# Altium PCB ECAD_Clock.PcbDoc (part 1 of 2)
Units mm, origin at the board's own origin, x right, y up, seen from the top; angles counter-clockwise.
Board outline 71.5 x 59 mm, 4 copper layers (Component Side, Ground, Power, Solder Side), stack 1.597 mm thick; 117 components, 85 nets, 458 pads, 750 vias.
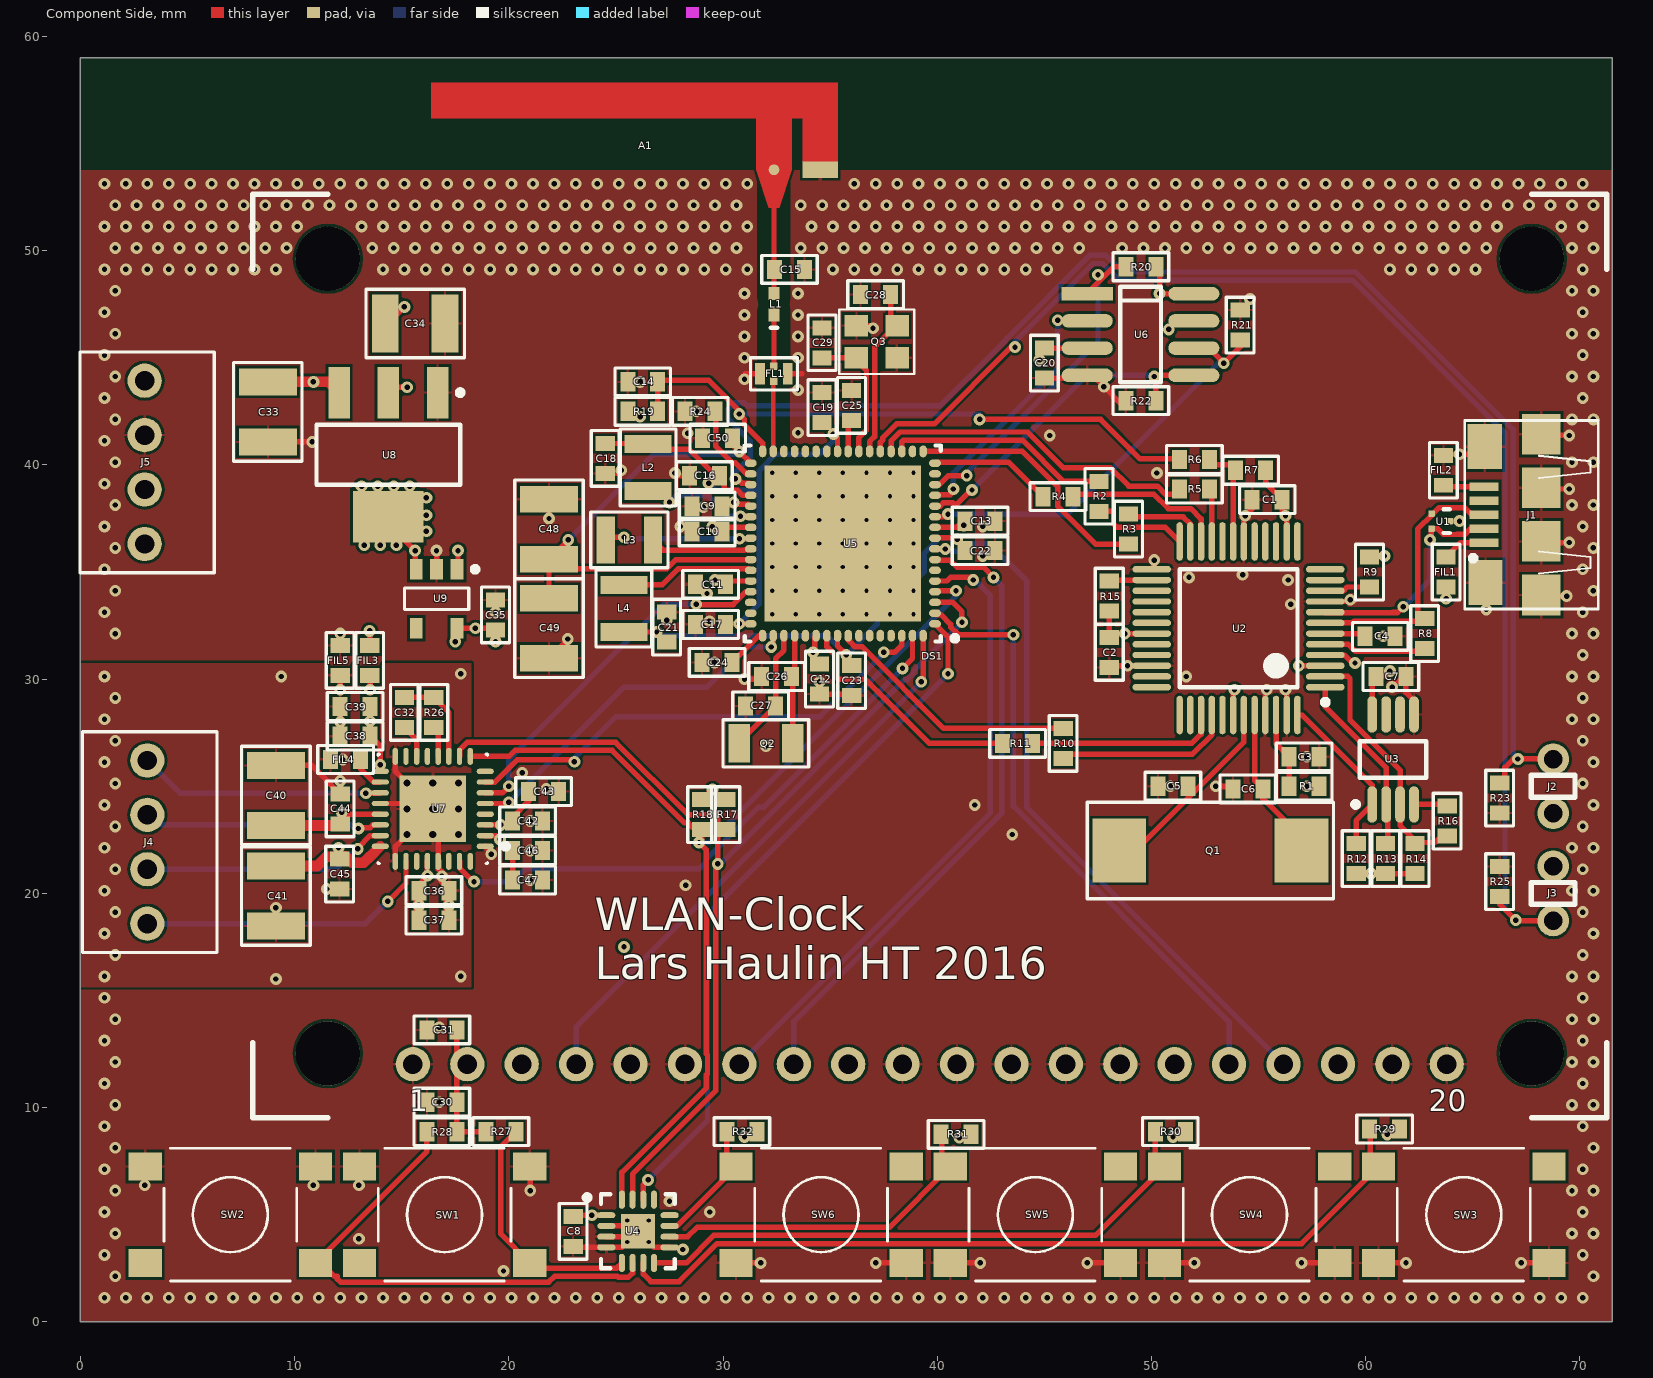
[diagram p0: Component Side view]
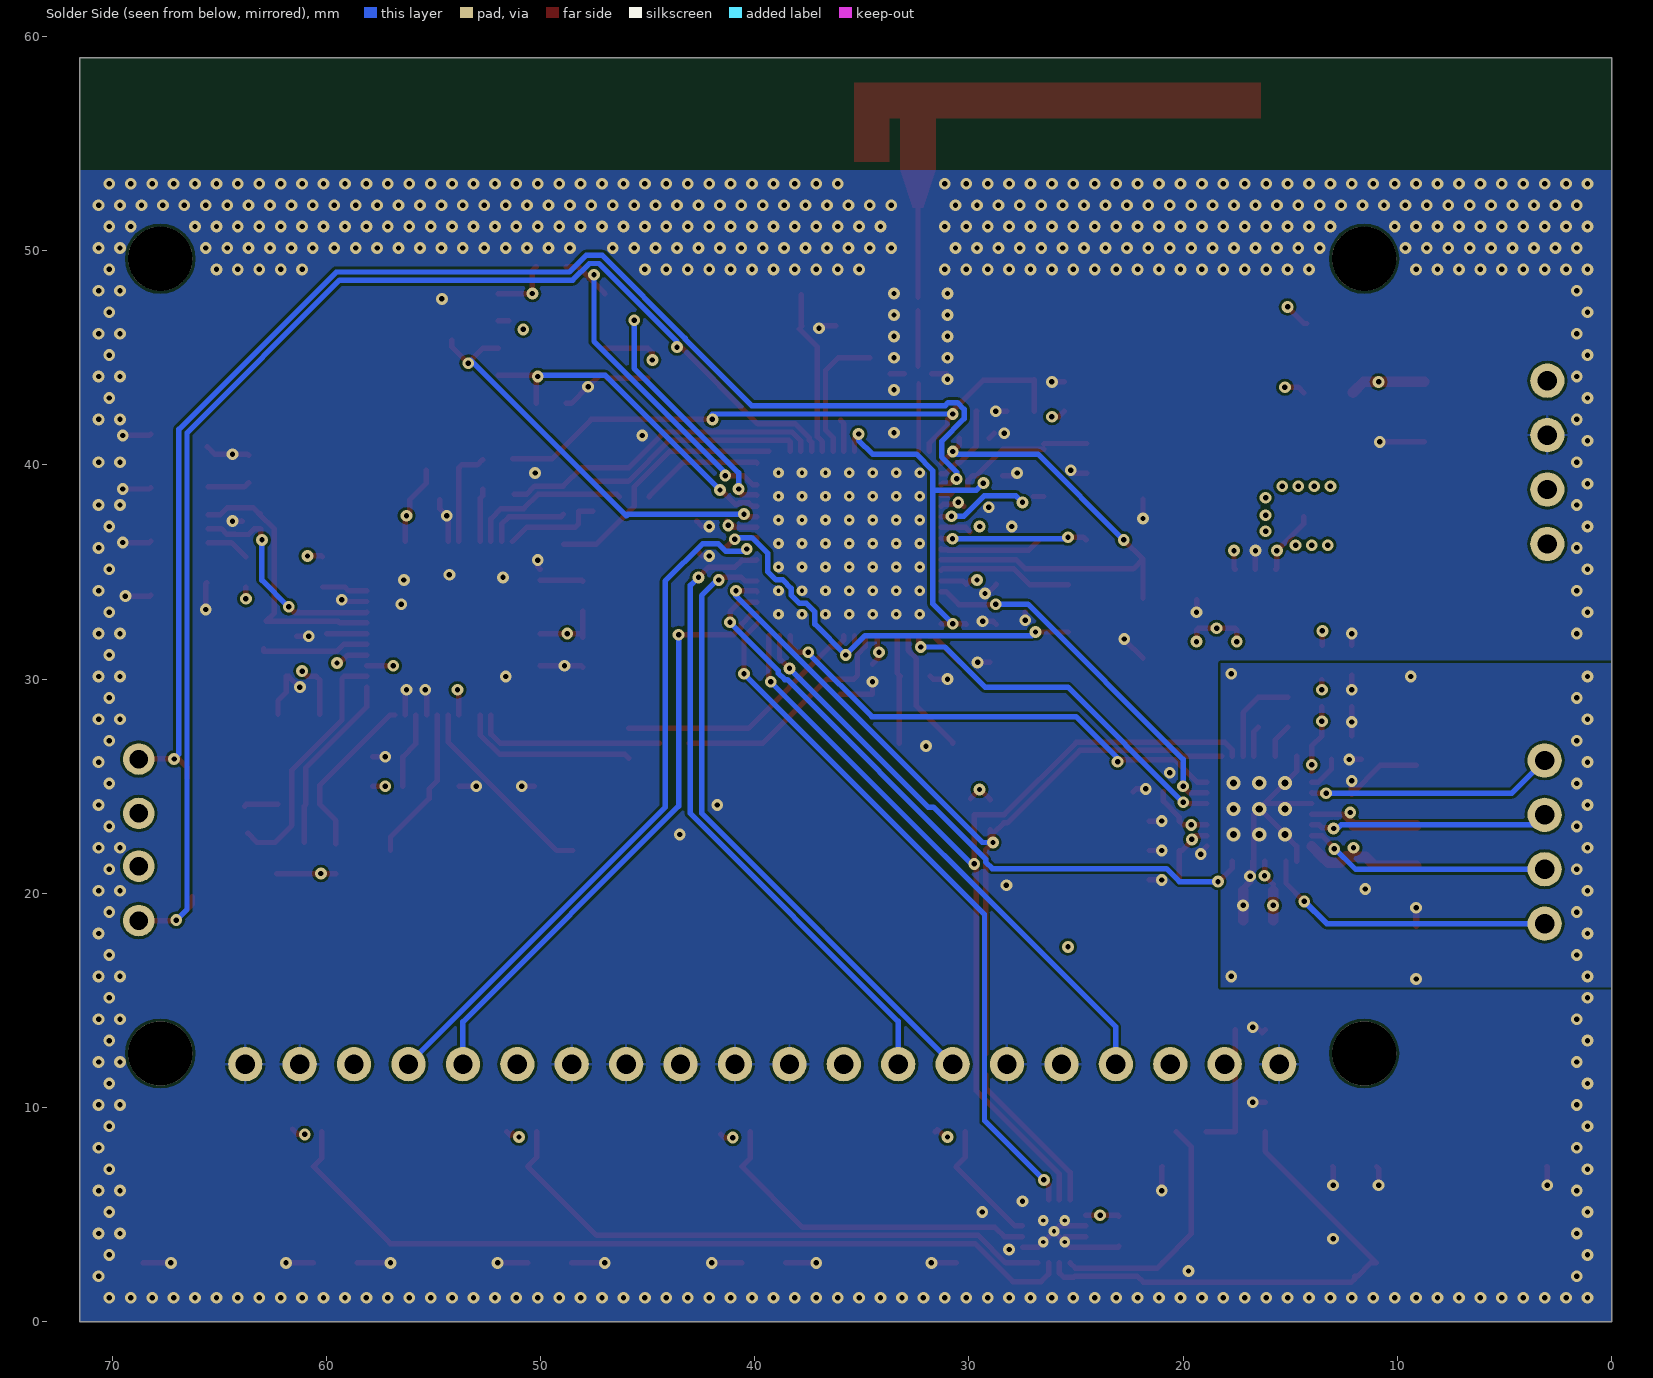
[diagram p1: Solder Side view, seen from below]
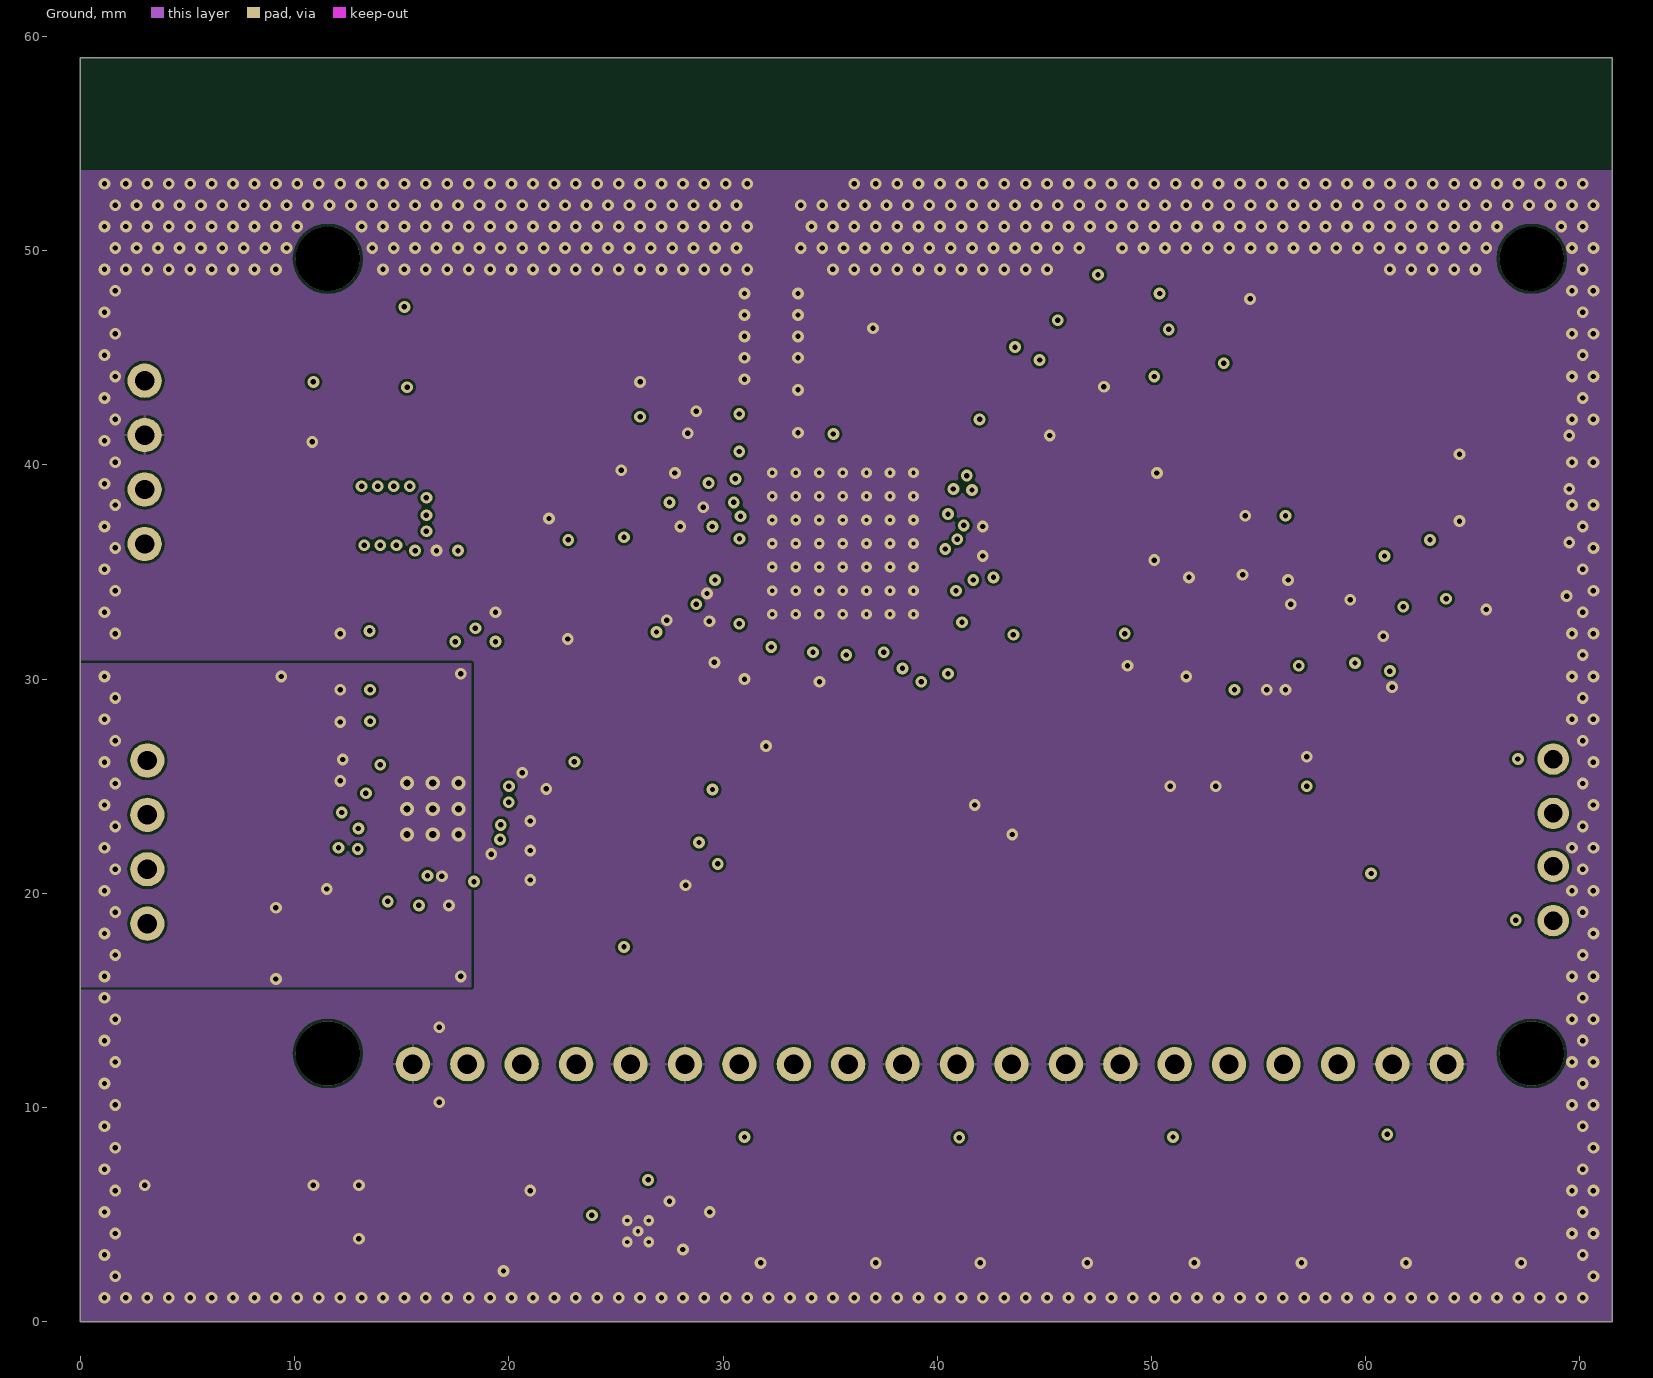
[diagram p2: Ground]
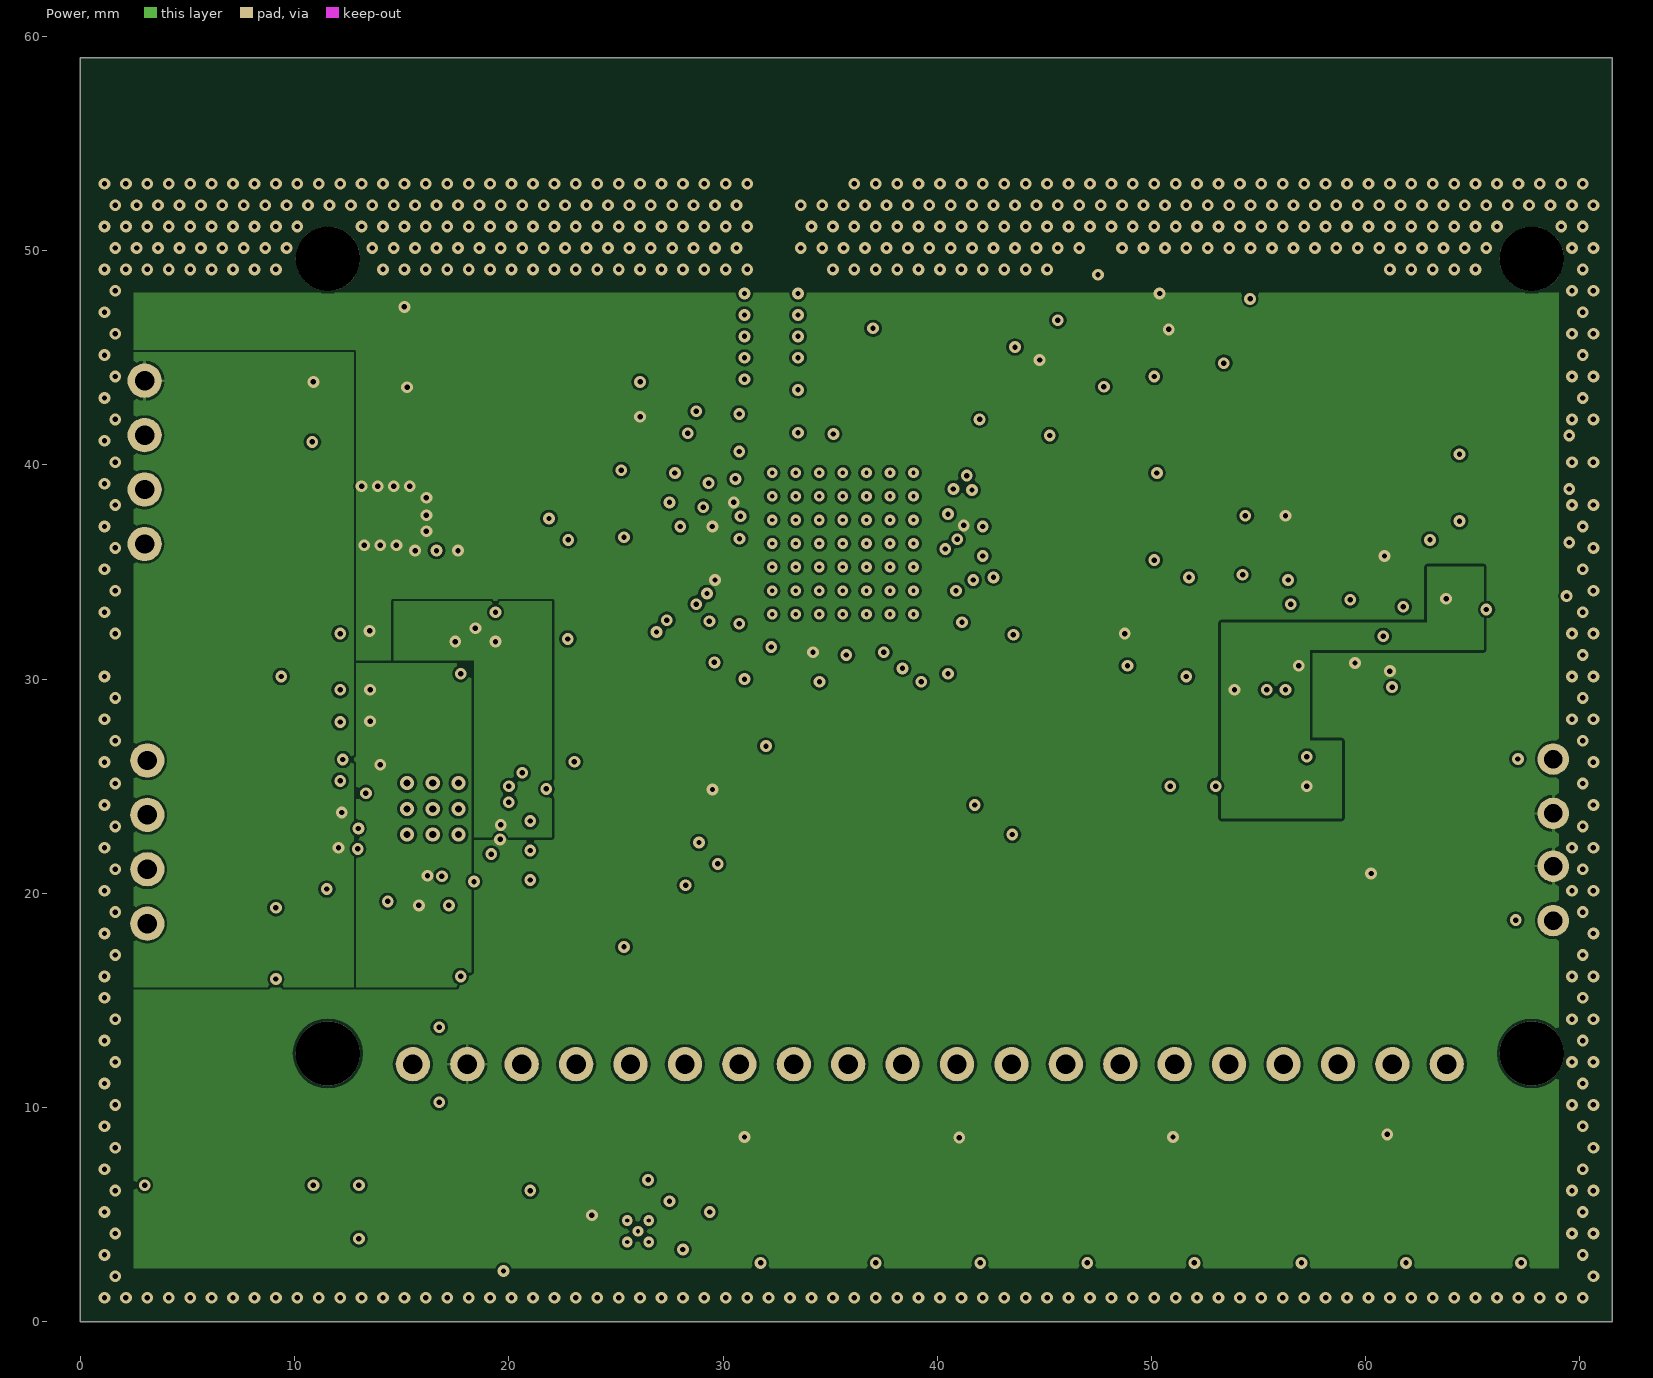
[diagram p3: Power]

## Layer stack, top to bottom
Top Solder: solder mask 0.0102, Solder Resist, Dk 3.5
Component Side: signal copper 0.0356
Dielectric 1: prepreg 0.127, FR-4, Dk 4.2
Ground: signal copper 0.036
Dielectric 3: core 1.2, FR-4, Dk 4.2
Power: signal copper 0.036
Dielectric 4: prepreg 0.127, FR-4, Dk 4.2
Solder Side: signal copper 0.0356
Bottom Solder: solder mask 0.0102, Solder Resist, Dk 3.5

## Board outline
0,0 0,59 71.5,59 71.5,0

## Design rules (kind name [scope] priority, off if disabled: settings)
Clearance AntennaClearance [InNetClass('AntennaTransmission') And IsWire vs InPolygon] p1: gap=0.675
Clearance [All] p2: gap=0.125
HoleSize [All] p1: absolutevalues=TRUE maxlimit=3.5 minlimit=0.025 maxpercent=80.000 minpercent=20.000
MinimumSolderMaskSliver [All] p1: minsoldermaskwidth=0
PolygonConnect ViaConnect [isVia] p1: connectstyle=Direct reliefconductorwidth=0.254 reliefentries=4 polygonreliefangle="90 Angle" airgapwidth=0.254
PolygonConnect [All] p2: connectstyle=Relief reliefconductorwidth=0.125 reliefentries=4 polygonreliefangle="90 Angle" airgapwidth=0.125
RoomDefinition Microcontroller [InComponentClass('Microcontroller')] p1: confinementstyle=ConfineIn formatcopy=TRUE lockcomponents=FALSE outline 15.986,51.618 15.986,57.972 36.317,57.972 36.317,50.229 55.814,50.229 55.814,47.939 56.02,41.591 43.555,41.591 43.555,19.875 65.271,19.875 65.271,27.34 70.75,27.34 70.75,17.031 40,17.031 40,25.571 29.671,25.571 29.671,29.746 19.946,29.746 19.946,51.618
RoomDefinition "Audio DAC" [InComponentClass('Audio DAC')] p2: confinementstyle=ConfineIn formatcopy=TRUE lockcomponents=FALSE outline -0.229,16.916 -0.229,27.874 11.146,27.874 11.146,32.504 13.104,32.504 14.479,32.504 14.479,30.074 17.479,30.074 17.479,27.349 20.352,27.349 20.352,25.729 23.254,25.729 23.254,23.771 22.504,23.771 22.504,22.396 22.504,19.646 19.879,19.646 19.879,16.271 16.621,16.271 16.621,16.916
RoomDefinition "External programmer" [InComponentClass('External programmer')] p3: confinementstyle=ConfineIn formatcopy=TRUE lockcomponents=FALSE outline 42.121,26.021 42.121,27.979 43.996,27.979 43.996,39.496 46.571,39.496 46.571,40.165 50.621,40.165 50.621,41.479 59.396,41.479 59.396,43.129 61.354,43.129 61.354,42.737 71.17,42.737 71.17,32.619 66.104,32.619 66.104,27.421 64.779,27.421 64.779,21.746 63.279,21.746 63.279,19.996 58.571,19.996 58.571,20.021 47.446,20.021 47.446,21.421 46.546,21.421 46.546,25.371 44.896,25.371 44.896,26.021
RoomDefinition Power [InComponentClass('Power')] p4: confinementstyle=ConfineIn formatcopy=TRUE lockcomponents=FALSE outline -0.354,34.641 -0.354,45.599 12.996,45.599 12.996,48.529 18.254,48.529 18.254,36.129 18.929,36.129 18.929,34.629 20.354,34.629 20.354,31.371 18.396,31.371 14.596,31.371 14.596,34.641
RoomDefinition "I/O extender" [InComponentClass('I/O extender')] p5: confinementstyle=ConfineIn formatcopy=TRUE lockcomponents=FALSE outline 1.683,1.532 1.683,8.468 11.682,8.468 28.021,8.468 28.021,25.379 29.271,25.379 29.271,26.004 31.229,26.004 31.229,8.468 49.892,8.468 69.892,8.468 69.892,1.532 59.892,1.532 49.257,1.532
RoomDefinition Display [InComponentClass('Display')] p6: confinementstyle=ConfineIn formatcopy=TRUE lockcomponents=FALSE outline 8.25,9.083 71.5,9.083 71.5,16 8.25,16
RoutingVias [All] p1: holewidth=0.711 width=1.27 viastyle="Through Hole" minholewidth=0.711 minwidth=1.27 maxholewidth=0.711 maxwidth=1.27
SolderMaskExpansion [All] p1: expansion=0.102
Width WidthAntenna [InNetClass('AntennaTransmission')] p1: maxlimit=0.225 minlimit=0.225 preferedwidth=0.225
Width WidthAudio [InNetClass('SpeakerLines')] p2: maxlimit=0.25 minlimit=0.25 preferedwidth=0.25
Width WidthPower [InNetClass('Power')] p3: maxlimit=0.5 minlimit=0.25 preferedwidth=0.5
Width [All] p4: maxlimit=0.254 minlimit=0.254 preferedwidth=0.254
28 further rules are at their usual default settings.

## Classes and differential pairs
net class SpeakerLines: SPLM SPLP SPRM SPRP
net class Power: +1.8VD +3.3VA +3.3VD +5.0VA +5.0VBUS AGND GND
component class Microcontroller: A1 C9 C10 C11 C12 C13 C14 C15 C16 C17 C18 C19 C20 C21 C22 C23 C24 C25 C26 C27 C28 C29 C48 C49 C50 FL1 J2 J3 L1 L2 L3 L4 Q2 Q3 R19 R20 R21 R22 R23 R24 R25 U5 U6
component class "I/O extender": C8 R17 R18 R27 R28 R29 R30 R31 R32 SW1 SW2 SW3 SW4 SW5 SW6 U4
component class "External programmer": C1 C2 C3 C4 C5 C6 C7 FIL1 FIL2 J1 Q1 R1 R2 R3 R4 R5 R6 R7 R8 R9 R10 R11 R12 R13 R14 R15 R16 U1 U2 U3
component class Display: C30 C31 DS1
component class "Audio DAC": C32 C36 C37 C38 C39 C40 C41 C42 C43 C44 C45 C46 C47 FIL3 FIL4 FIL5 J4 R26 U7
component class Power: C33 C34 C35 J5 U8 U9
net class AntennaTransmission: ANT_CONN ANT_FILT ANT_UC

## Components (designator, comment, footprint, x,y, rotation, side; value= is the part's Value field where it differs from the comment)
A1 "Antenna_2.4GHz_L" Antenna_2.45GHz_IFA1_L 32.375,53.775 r0 top net-tie
C1 "100nF" C_0603A 55.4,38.375 r180 top
C2 "100nF" C_0603A 48.025,31.25 r270 top
C3 "100nF" C_0603A 57.125,26.375 r0 top
C4 "33nF" C_0603A 60.675,32 r0 top
C5 "27pF" C_0603A 51,25 r180 top
C6 "27pF" C_0603A 54.5,24.875 r180 top
C7 "100nF" C_0603A 61.175,30.125 r0 top
C8 "100nF" C_0603A 23,4.225 r270 top
C9 "4.7uF" C_0603A 29.25,38.075 r180 top
C10 "4.7uF" C_0603A 29.25,36.875 r180 top
C11 "4.7uF" C_0603A 29.417,34.425 r180 top
C12 "0.1uF" C_0603A 34.5,30 r270 top
C13 "0.1uF" C_0603A 42,37.375 r0 top
C14 "100nF" C_0603A 26.25,43.875 r180 top
C15 "100nF" C_0603A 33.1,49.125 r0 top
C16 "100nF" C_0603A 29.125,39.5 r180 top
C17 "100nF" C_0603A 29.417,32.55 r180 top
C18 "10uF" C_0603A 24.5,40.3 r270 top
C19 "100nF" C_0603A 34.617,42.675 r90 top
C20 "100nF" C_0603A 45,44.75 r270 top
C21 "10uF" C_0603A 27.367,32.425 r90 top
C22 "100nF" C_0603A 42,36 r0 top
C23 "100nF" C_0603A 36,29.925 r270 top
C24 "100nF" C_0603A 29.717,30.78 r180 top
C25 "100nF" C_0603A 35.992,42.78 r90 top
C26 "10pF" C_0603A 32.5,30.125 r180 top
C27 "10pF" C_0603A 31.75,28.75 r180 top
C28 "6.2pF" C_0603A 37.117,47.95 r180 top
C29 "6.2pF" C_0603A 34.617,45.7 r90 top
C30 "100nF" C_0603A 16.875,10.25 r180 top
C31 "4.5uF" C_0603A 16.875,13.625 r180 top
C32 "100nF" C_0603A 15.125,28.445 r270 top
C33 "100uF" C_1210D 8.75,42.475 r270 top
C34 "100uF" C_1210D 15.625,46.6 r0 top
C35 "10uF" C_0603A 19.375,33 r90 top
C36 "100nF" C_0603A 16.5,20.125 r0 top
C37 "10uF" C_0603A 16.5,18.75 r0 top
C38 "100nF" C_0603A 12.823,27.345 r180 top
C39 "10uF" C_0603A 12.823,28.72 r180 top
C40 "22uF" C_1210D 9.125,24.57 r90 top
C41 "22uF" C_1210D 9.125,19.88 r270 top
C42 "100nF" C_0603A 20.875,23.375 r0 top
C43 "10uF" C_0603A 21.625,24.75 r0 top
C44 "100nF" C_0603A 12.125,23.945 r90 top
C45 "100nF" C_0603A 12.1,20.9 r270 top
C46 "100nF" C_0603A 20.875,22 r0 top
C47 "10uF" C_0603A 20.875,20.625 r0 top
C48 "22uF" C_1210D 21.875,37 r90 top
C49 "22uF" C_1210D 21.875,32.375 r270 top
C50 "100nF" C_0603A 29.75,41.25 r180 top
DS1 "NHD-2.23-12832UCY3" NHD-2.23-12832UCY3_FP 39.65,12.025 r0 top locked
FIL1 "FB" FB_0603 63.75,35 r90 top
FIL2 "FB" FB_0603 63.625,39.75 r270 top
FIL3 "FB" FB_0603 13.5,30.875 r270 top
FIL4 "FB" FB_0603 12.375,26.25 r0 top
FIL5 "FB" FB_0603 12.125,30.875 r270 top
FL1 "DEA202450BT-1294C1-H" DEA202450BT-1294C1-H 32.375,44.25 r0 top
J1 "USB Micro Type-B_SMD" "MICRO USB TYPE-B_SMD" 64.819,37.675 r90 top
J2 "SOP0" JUMPER100 68.75,25 r90 top
J3 "SOP2" JUMPER100 68.75,20 r270 top
J4 "282834-4" HEADER_2.54_SCREW_4PIN 3.125,22.395 r270 top
J5 "282834-4" HEADER_2.54_SCREW_4PIN 3,40.12 r270 top
L1 "3.6nH" 0402-A 32.375,47.5 r90 top
L2 "2.2uH" L_1008 26.5,39.875 r270 top
L3 "1uH" L_1008 25.625,36.5 r180 top
L4 "2.2uH" L_1008 25.367,33.3 r90 top
Q1 "6MHz" QUARTZ_10x4.5 52.75,22 r0 top
Q2 "32.768" Q_FC135 32,27 r180 top
Q3 "40MHz" SM/25X20/CMOS_CLK_4 37.175,45.75 r180 top
R1 "100k" R_0603 57.125,25 r180 top
R2 "27" R_0603 47.55,38.536 r270 top
R3 "27" R_0603 48.925,37 r90 top
R4 "27" R_0603 45.625,38.517 r0 top
R5 "27" R_0603 52,38.875 r0 top
R6 "27" R_0603 52,40.25 r0 top
R7 "10k" R_0603 54.625,39.75 r180 top
R8 "1,5k" R_0603 62.75,32.125 r90 top
R9 "10k" R_0603 60.175,35 r270 top
R10 "27" R_0603 45.875,27 r270 top
R11 "27" R_0603 43.75,27 r0 top
R12 "10k" R_0603 59.55,21.625 r90 top
R13 "10k" R_0603 60.925,21.625 r90 top
R14 "10k" R_0603 62.3,21.625 r90 top
R15 "10k" R_0603 48.025,33.875 r90 top
R16 "2.2k" R_0603 63.8,23.375 r90 top
R17 "10k" R_0603 30.125,23.675 r270 top
R18 "10k" R_0603 29,23.673 r270 top
R19 "100k" R_0603 26.25,42.5 r0 top
R20 "100k" R_0603 49.5,49.25 r180 top
R21 "100k" R_0603 54.138,46.525 r270 top
R22 "100k" R_0603 49.5,43 r0 top
R23 "100k" R_0603 66.25,24.45 r270 top
R24 "100k" R_0603 28.925,42.5 r180 top
R25 "2.7k" R_0603 66.25,20.55 r90 top
R26 "2.2k" R_0603 16.5,28.445 r270 top
R27 "100k" R_0603 19.625,8.875 r0 top
R28 "100k" R_0603 16.875,8.875 r180 top
R29 "100k" R_0603 60.875,9 r180 top
R30 "100k" R_0603 50.875,8.875 r180 top
R31 "100k" R_0603 40.875,8.75 r180 top
R32 "100k" R_0603 30.875,8.875 r180 top
SW1 "430152130826" 430152130826 17,5 r180 top
SW2 "430152130826" 430152130826 7,5 r180 top
SW3 "430152130826" 430152130826 64.575,5 r0 top
SW4 "430152130826" 430152130826 54.575,5 r0 top
SW5 "430152130826" 430152130826 44.575,5 r0 top
SW6 "430152130826" 430152130826 34.575,5 r0 top
U1 "TPD2EUSB30ADRTR" DRT0003A 63.5,37.375 r0 top
U2 "FT2232D" LQFP-48_N 54.061,32.375 r180 top
U3 "93LC46B-I/MS" MSOP-MS8_N 61.275,26.25 r90 top
U4 "PCF8574RGTRG4" RGT16-1600X1600TP 26.025,4.225 r0 top
U5 "CC3200" PQFN50P900X900X100_HS-65N 35.592,36.33 r180 top
U6 "M25PX80-VMN6TP" SOG.050/8/WG.244/L.175 46.997,47.992 r270 top
U7 "TLV320AIC3110" QFN50P500X500X80-32N 16.448,23.945 r180 top
U8 "LD1117S33CTR" SOT-223_N 14.375,40.475 r270 top
U9 "RT9080-18GJ5" SOT95P275X100-5N 16.625,33.75 r270 top

## Footprints (in the part's own frame and the unit in brackets; to place one, negate y for a bottom-side part, rotate by r counter-clockwise, add the part's x,y. Pads: shape width x height; smd on the part's side, far side on the other; paste and mask are expansions set on the pad)
0402-A [mm] "Chip Inductor, Body 1.0x0.5mm, IPC High Density"
  rect 0.6x0.5 smd: 1(-0.5,0) 2(0.5,0)
  silkscreen extent -1.1,-0.15 -1.1,0.15, body extent -0.55,-0.3 0.55,0.3, height 0.55
430152130826 [mm] "6*6mm vertical type, SMD, height 13.0mm, white actuator, 260gf, T&R"
  rect 1.55x1.3 smd: 1(-3.975,2.25) 2(-3.975,-2.25) 3(3.975,2.25) 4(3.975,-2.25)
  silkscreen extent -3.1,-3.1 3.1,3.1, body extent -4.5,-3.1 4.5,3.1, height 12.99
Antenna_2.45GHz_IFA1_L [mil]
  round 19.68 smd: 1(0,0)
  rect 65x30 smd: 2(85,0)
  Component Side region: 117.5,15 52.5,15 52.5,160 117.5,160
  Component Side region: 117.5,160.16 117.5,95 -630,95 -630,160.16
  Component Side region: 32.66,0.16 10,-70 -10,-70 -32.5,0.16 -32.5,160 32.66,160
C_0603A [mm]
  rect 0.7x0.9 smd: 1(-0.7,0) 2(0.7,0)
  silkscreen extent -1.3,-0.65 1.3,0.65, body extent -0.8,-0.4 0.8,0.4, height 0.52
C_1210D [mm]
  rect 1.25x2.7 smd: 1(-1.4,0) 2(1.4,0)
  silkscreen extent -2.3,-1.6 2.3,1.6, body extent -1.6,-1.25 1.6,1.25, height 2.52
DEA202450BT-1294C1-H [mm]
  rect 0.35x0.35 smd: 1(0,-0.35) 3(0,0.35)
  rect 0.45x1 smd: 2(0.65,0) 4(-0.65,0)
  silkscreen extent -1.1,-0.75 1.1,0.75, body extent -1,-0.65 1,0.65, height 0.81
DRT0003A [mm] "SOTFL, 3-Leads, Body 1x1mm (inc leads), Pitch 0.35mm"
  rrect33% 0.3x0.3 smd: 1(-0.425,0.35) 2(-0.425,-0.35) 3(0.425,0)
  silkscreen extent 0.12,-0.55 0.43,0.55, body extent -0.5,-0.5 0.5,0.5, height 0.5
FB_0603 [mm]
  rect 0.7x0.9 smd: 1(-0.7,0) 2(0.7,0)
  silkscreen extent -1.3,-0.65 1.3,0.65, body extent -0.8,-0.4 0.8,0.4, height 0.42
HEADER_2.54_SCREW_4PIN [mm]
  round 1.6 hole 0.9: 1(-3.81,0) 2(-1.27,0) 3(1.27,0) 4(3.81,0)
  silkscreen extent -5.15,-3.02 5.15,3.25, body extent -5.15,-3.03 5.15,3.19, height 8.64
JUMPER100 [mil]
  round 58 hole 34: 1(-50,0) 2(50,0)
  silkscreen extent -20,-40 20,40
L_1008 [mm]
  rect 0.85x2.2 smd: 1(-1.1,0) 2(1.1,0)
  silkscreen extent -1.8,-1.3 1.8,1.3, body extent -1.25,-1 1.25,1, height 1.62
LQFP-48_N [mm] "Thin QFP, 48-Leads, Body 7x7mm, Pitch 0.5mm, IPC Medium Density"
  oval 1.8x0.3 smd: 1(-4.05,2.75) 2(-4.05,2.25) 3(-4.05,1.75) 4(-4.05,1.25) 5(-4.05,0.75) 6(-4.05,0.25) 7(-4.05,-0.25) 8(-4.05,-0.75) 9(-4.05,-1.25) 10(-4.05,-1.75) 11(-4.05,-2.25) 12(-4.05,-2.75) 25(4.05,-2.75) 26(4.05,-2.25) 27(4.05,-1.75) 28(4.05,-1.25) 29(4.05,-0.75) 30(4.05,-0.25) 31(4.05,0.25) 32(4.05,0.75) 33(4.05,1.25) 34(4.05,1.75) 35(4.05,2.25) 36(4.05,2.75)
  oval 0.3x1.8 smd: 13(-2.75,-4.05) 14(-2.25,-4.05) 15(-1.75,-4.05) 16(-1.25,-4.05) 17(-0.75,-4.05) 18(-0.25,-4.05) 19(0.25,-4.05) 20(0.75,-4.05) 21(1.25,-4.05) 22(1.75,-4.05) 23(2.25,-4.05) 24(2.75,-4.05) 37(2.75,4.05) 38(2.25,4.05) 39(1.75,4.05) 40(1.25,4.05) 41(0.75,4.05) 42(0.25,4.05) 43(-0.25,4.05) 44(-0.75,4.05) 45(-1.25,4.05) 46(-1.75,4.05) 47(-2.25,4.05) 48(-2.75,4.05)
  silkscreen extent -4.18,-2.75 2.75,3.57, body extent -3.5,-3.5 3.5,3.5, height 1.6
"MICRO USB TYPE-B_SMD" [mm]
  rect 0.4x1.35 smd: 1(-1.3,-0.7) 2(-0.65,-0.7) 3(0,-0.7) 4(0.65,-0.7) 5(1.3,-0.7)
  rect 1.9x1.8 smd: SH(-3.75,-3.375) SH(-1.244,-3.375) SH(1.256,-3.375) SH(3.756,-3.375)
  rect 2.1x1.6 smd: SH(-3.175,-0.765) SH(3.175,-0.735)
  silkscreen extent -4.4,-6.03 4.4,0.2, body extent -3.9,-6.03 3.9,-1.03, height 2.68
MSOP-MS8_N [mm] "TSOP, 8-Leads, Body 3x3mm, Pitch 0.65mm, IPC Medium Density"
  oval 1.7x0.45 smd: 1(-2.1,0.975) 2(-2.1,0.325) 3(-2.1,-0.325) 4(-2.1,-0.975) 5(2.1,-0.975) 6(2.1,-0.325) 7(2.1,0.325) 8(2.1,0.975)
  silkscreen extent -2.22,-1.55 0.85,1.87, body extent -1.55,-1.55 1.55,1.55, height 1.1
NHD-2.23-12832UCY3_FP [mm]
  round 1.6 hole 0.9: 1(-24.13,0) 2(-21.59,0) 3(-19.05,0) 4(-16.51,0) 5(-13.97,0) 6(-11.43,0) 7(-8.89,0) 8(-6.35,0) 9(-3.81,0) 10(-1.27,0) 11(1.27,0) 12(3.81,0) 13(6.35,0) 14(8.89,0) 15(11.43,0) 16(13.97,0) 17(16.51,0) 18(19.05,0) 19(21.59,0) 20(24.13,0)
  round 3 hole 3 unplated: 21(-28.1,0.5) 21(-28.1,37.6) 21(28.1,0.5) 21(28.1,37.6)
  silkscreen extent -31.6,-2.5 31.6,40.6, body extent -31.6,-2.5 31.6,40.6, height 8.5
PQFN50P900X900X100_HS-65N [mm] "PQFN, 64-Leads, Body 9.00x9.00mm, Pitch 0.50mm, Thermal Pad 7.30x7.30mm, IPC Medium Density"
  oval 0.55x0.35 smd: 1(-4.3,3.75) 2(-4.3,3.25) 3(-4.3,2.75) 4(-4.3,2.25) 5(-4.3,1.75) 6(-4.3,1.25) 7(-4.3,0.75) 8(-4.3,0.25) 9(-4.3,-0.25) 10(-4.3,-0.75) 11(-4.3,-1.25) 12(-4.3,-1.75) 13(-4.3,-2.25) 14(-4.3,-2.75) 15(-4.3,-3.25) 16(-4.3,-3.75) 33(4.3,-3.75) 34(4.3,-3.25) 35(4.3,-2.75) 36(4.3,-2.25) 37(4.3,-1.75) 38(4.3,-1.25) 39(4.3,-0.75) 40(4.3,-0.25) 41(4.3,0.25) 42(4.3,0.75) 43(4.3,1.25) 44(4.3,1.75) 45(4.3,2.25) 46(4.3,2.75) 47(4.3,3.25) 48(4.3,3.75)
  oval 0.35x0.55 smd: 17(-3.75,-4.3) 18(-3.25,-4.3) 19(-2.75,-4.3) 20(-2.25,-4.3) 21(-1.75,-4.3) 22(-1.25,-4.3) 23(-0.75,-4.3) 24(-0.25,-4.3) 25(0.25,-4.3) 26(0.75,-4.3) 27(1.25,-4.3) 28(1.75,-4.3) 29(2.25,-4.3) 30(2.75,-4.3) 31(3.25,-4.3) 32(3.75,-4.3) 49(3.75,4.3) 50(3.25,4.3) 51(2.75,4.3) 52(2.25,4.3) 53(1.75,4.3) 54(1.25,4.3) 55(0.75,4.3) 56(0.25,4.3) 57(-0.25,4.3) 58(-0.75,4.3) 59(-1.25,4.3) 60(-1.75,4.3) 61(-2.25,4.3) 62(-2.75,4.3) 63(-3.25,4.3) 64(-3.75,4.3)
  rect 7.3x7.3 smd: 65(0,0)
  silkscreen extent -5.35,-4.57 4.57,4.58, body extent -4.57,-4.57 4.57,4.57, height 1
Q_FC135 [mm]
  rect 1x1.8 smd: 1(-1.25,0) 2(1.25,0)
  silkscreen extent -2,-1.1 2,1.1, body extent -1.6,-0.8 1.6,0.8, height 0.8
QFN50P500X500X80-32N [mm]
  oval 0.8x0.25 smd: 1(-2.45,1.75) 2(-2.45,1.25) 3(-2.45,0.75) 4(-2.45,0.25) 5(-2.45,-0.25) 6(-2.45,-0.75) 7(-2.45,-1.25) 8(-2.45,-1.75) 17(2.45,-1.75) 18(2.45,-1.25) 19(2.45,-0.75) 20(2.45,-0.25) 21(2.45,0.25) 22(2.45,0.75) 23(2.45,1.25) 24(2.45,1.75)
  oval 0.25x0.8 smd: 9(-1.75,-2.45) 10(-1.25,-2.45) 11(-0.75,-2.45) 12(-0.25,-2.45) 13(0.25,-2.45) 14(0.75,-2.45) 15(1.25,-2.45) 16(1.75,-2.45) 25(1.75,2.45) 26(1.25,2.45) 27(0.75,2.45) 28(0.25,2.45) 29(-0.25,2.45) 30(-0.75,2.45) 31(-1.25,2.45) 32(-1.75,2.45)
  rect 3.1x3.1 smd: 33(0,0)
  silkscreen extent -3.53,-2.55 2.55,2.55, body extent -2.55,-2.55 2.55,2.55, height 0.8
QUARTZ_10x4.5 [mm]
  rect 2.5x3 smd: 1(-4.25,0) 2(4.25,0)
  silkscreen extent -5.75,-2.25 5.75,2.25, body extent -5,-2.25 5,2.22, height 1.7
R_0603 [mm]
  rect 0.7x0.9 smd: 1(-0.7,0) 2(0.7,0)
  silkscreen extent -1.3,-0.65 1.3,0.65, body extent -0.8,-0.4 0.8,0.4, height 0.42
RGT16-1600X1600TP [mm] "QFN, 16-Leads, Body 3x3mm, Pitch 0.5mm, Thermal Pad 1.6x1.6mm, TI Recommended"
  oval 0.85x0.28 smd paste-0.025 mask+0.07: 1(-1.475,0.75) 2(-1.475,0.25) 3(-1.475,-0.25) 4(-1.475,-0.75) 9(1.475,-0.75) 10(1.475,-0.25) 11(1.475,0.25) 12(1.475,0.75)
  oval 0.28x0.85 smd paste-0.025 mask+0.07: 5(-0.75,-1.475) 6(-0.25,-1.475) 7(0.25,-1.475) 8(0.75,-1.475) 13(0.75,1.475) 14(0.25,1.475) 15(-0.25,1.475) 16(-0.75,1.475)
  rect 1.6x1.6 smd paste-0.8 mask+0.07: 17(0,0)
  silkscreen extent -2.5,-1.73 1.72,1.73, body extent -1.57,-1.57 1.58,1.58, height 1
SM/25X20/CMOS_CLK_4 [mm]
  rect 1.1x1 smd: 1(-0.95,-0.75) 2(0.95,-0.75) 3(0.95,0.75) 4(-0.95,0.75)
  silkscreen extent -1.75,-1.5 1.75,1.5, body extent -1.25,-1 1.25,1, height 0.75
SOG.050/8/WG.244/L.175 [mil]
  rect 25x94 smd: 1(0,0)
  oval 25x94 smd: 2(50,0) 3(100,0) 4(150,0) 5(150,196) 6(100,196) 7(50,196) 8(0,196)
  silkscreen extent -12,60 163,135, body extent -22,21 171,176, height 59
SOT95P275X100-5N [mm]
  rect 0.95x0.6 smd: 1(-1.375,0.95) 2(-1.375,0) 3(-1.375,-0.95) 4(1.375,-0.95) 5(1.375,0.95)
  silkscreen extent -1.5,-1.5 0.5,1.93, body extent -1.5,-1.5 1.5,1.5, height 1
SOT-223_N [mm] "SOT223, 4-Leads, Body 6.5x3.5mm, Pitch 2.3mm, Lead Span 7mm, IPC Medium Density"
  rect 2.4x1 smd: 1(-2.9,2.3) 2(-2.9,0) 3(-2.9,-2.3)
  rect 2.4x3.3 smd: 4(2.9,0)
  silkscreen extent -3.02,-3.35 1.4,3.48, body extent -1.85,-3.35 1.85,3.35, height 1.8

## Part data
C1 C2 C3 C4 C5 C6 C7 C8 C9 C10 C11 C12 C13 C14 C15 C16 C17 C18 C19 C20 C21 C22 C23 C24 C25 C26 C27 C28 C29 C30 C31 C32 C35 C36 C37 C38 C39 C42 C43 C44 C45 C46 C47 C50: library part C_0603
C33 C34 C40 C41 C48 C49: library part C_1210
DS1: "OLED DISPLAY"
FIL1 FIL2 FIL3 FIL4 FIL5: library part FB_0603
FL1: "2.45 GHz filter"
J1: "USB Micro Type-B"
J2 J3: library part JUMPER_100, "Jumper 2.54 mm"
J4 J5: library part TERM_LIST_4
L1: library part Inductor, "Inductor"
L2 L3 L4: library part L_1008
Q1: library part QUARTZ_10x4.5mm
Q2: library part QUARTZ_3.2x1.5
Q3: library part QUARTZ_3.2x2.5
R1 R2 R3 R4 R5 R6 R7 R8 R9 R10 R11 R12 R13 R14 R15 R16 R17 R18 R19 R20 R21 R22 R23 R24 R25 R26 R27 R28 R29 R30 R31 R32: library part R_0603
SW1 SW2 SW3 SW4 SW5 SW6: library part CMP-1452-00011-1, "WS-TASV SMD Tact Switch 6X6 mm"
U1: library part CMP-0326-00047-3, "ESD / Surge Solution for High Speed, Low Voltage Interface, 2 Channels, -40 to +85 degC, 3-pin SOT (DRT), Green (RoHS & no Sb/Br)"
U2: library part CMP-0078-00017-3, "FT2232D Dual USB to Serial UART/FIFO IC, -40 to +85 degC, 48-pin LQFP"
U3: library part CMP-0162-00461-1, "1K, 64x16-bit, 2.5V Microwire Serial EEPROM, 8-Pin MSOP, Industrial Temperature"
U4: library part CMP-0314-00047-1, "Remote 8-Bit I/O Expander for I2C-Bus, 2.5 to 6 V, -40 to 85 degC, 16-pin QFN (RGT), Green (RoHS & no Sb/Br)"
U5: "CC3200 Single-Chip Wireless MCU"
U6: "Serial Flash"
U8: library part CMP-0244-00307-1, "Fixed Low Drop Positive Voltage Regulator, 3.3V, 4-Pin SOT-223, Tape and Reel"
U9: "LDO 1.8V, 600mA"

## Via types
v1: diameter 0.55, hole 0.25, Component Side to Solder Side, tented both sides, 541 vias
v2: diameter 0.55, hole 0.25, Component Side to Solder Side, 146 vias
v3: diameter 0.5, hole 0.2, Component Side to Solder Side, tented both sides, 54 vias
v4: diameter 0.66, hole 0.33, Component Side to Solder Side, 9 vias

## Nets (pads, with @x,y where several pads share a name; then routed paths per layer and width w, separated by ;. In a path a pad name is that pad's centre, name@x,y a point inside that pad or via, vN(x,y) a via of type N, cw(c..) or ccw(c..) an arc to the next point about the centre after c; other vN are vias at no path point)
3.3VOUT: C4.1 U2.6 | length 1.9
  Component Side w0.254: U2.6@58.111,32.125 C4.1@59.975,32.125
+1.8VD: C35.1 C42.1 C43.1 U7.3 U9.5 | length 6.1
  Component Side w0.254: v2(17.5,31.75) 17.5,32.3 U9.5@17.575,32.375 v1(18.438,32.375) 19.3,32.375 C35.1@19.375,32.3 v2(19.375,31.75) ; U7.3@18.898,23.195 v2(19.625,23.195) 19.995,23.195 C42.1@20.175,23.375 20.175,23.55 20.925,24.3 C43.1@20.925,24.75
+3.3VA: C36.1 C37.1 C38.1 C39.1 FIL3.2 U7.17 U7.28 | length 6.3
  Component Side w0.25: C36.1@15.8,20.425 v1(16.2,20.825) v1(16.2,20.825) U7.28@16.198,21.495
  Component Side w0.254: C39.1@13.523,28.72 v1(13.523,28.032) C38.1@13.523,27.345 13.998,26.87 v1(13.998,26) U7.17@13.998,25.695 ; v1(13.523,29.5) FIL3.2@13.523,29.97
  Component Side w0.5: C37.1@15.8,18.75 v1(15.8,19.438) C36.1@15.8,20.125
+3.3VD: C1.1 C2.1 C7.1 C8.1 C9.1 C10.1 C11.1 C12.1 C13.1 C20.1 C30.1 C31.1 C34.1 C46.1 C47.1 DS1.2 FIL3.1 J2.1 J3.1 R7.1 R9.1 R12.1 R13.1 R14.1 R15.1 R17.1 R18.1 R19.1 R20.1 R27.1 R28.1 R29.1 R30.1 R31.1 R32.1 U2.4 U2.14 U2.31 U3.8 U4.1 U5.10 U5.37 U5.39 U5.44 U5.54 U6.3 U6.7 U6.8 U7.2 U8.2 U8.4 U9.1 U9.3 | length 51.2
  Component Side w0.254: FIL3.1@13.5,31.575 v2(13.5,32.25) ; C34.1@14.225,46.6 14.35,46.6 v2(15.125,47.375) ; U8.4@14.375,37.575 14.375,37.25 v2(15.625,36) 15.625,35.175 U9.3@15.675,35.125 ; U8.2@14.375,43.375 14.625,43.625 v2(15.25,43.625) ; C31.1@17.575,13.625 17.575,12.51 DS1.2@18.06,12.025 17.575,11.54 C30.1@17.575,10.25 R28.1@17.575,8.875 R27.1@18.925,8.875 ; U9.1@17.575,35.125 17.625,35.175 v2(17.625,36) ; U7.2@18.898,22.695 19.416,22.695 v2(19.593,22.518) ; v2@19.625,22.429 20.054,22 C46.1@20.175,22 C47.1@20.175,20.625 ; C8.1@23,4.925 23.05,4.975 v2(23.875,4.975) U4.1@24.55,4.975 ; R19.1@25.55,42.5 25.8,42.25 v2(26.125,42.25) ; R18.1@29,24.373 29.475,24.848 v1(29.504,24.848) R17.1@29.926,24.426 ; v2(29.625,34.625) 29.917,34.625 C11.1@30.117,34.425 30.272,34.58 U5.44@31.292,34.58 ; C10.1@29.95,36.875 30.155,37.08 U5.39@31.292,37.08 ; C9.1@30.242,38.075 30.417,38.25 v2(30.5,38.25) 30.598,38.153 31.209,38.153 31.287,38.075 U5.37@31.292,38.08 ; v2(31,8.625) 31.125,8.625 31.475,8.975 R32.1@31.575,8.875 ; U5.54@34.342,32.03 34.269,31.957 34.269,31.319 v2(34.2,31.25) 34.2,31 C12.1@34.5,30.7 ; U5.10@39.892,37.08 C13.1@41.005,37.08 ; v2(41.025,8.6) 41.425,8.6 R31.1@41.575,8.75 ; C13.1@41.3,37.375 C13.1@41.1,37.175 ; v2(44.775,44.9) 44.775,45.225 C20.1@45,45.45 46.995,45.45 U6.3@46.997,45.452 ; C2.1@48.025,31.95 C2.1@48.025,32.125 ; R15.1@48.025,33.175 C2.1@48.025,32.125 ; U2.31@50.011,32.125 C2.1@48.025,32.125 ; R20.1@50.2,49.25 50.375,49.075 v2(50.375,48) 50.383,47.992 U6.8@51.975,47.992 ; v2(51,8.625) 51.125,8.625 51.3,8.8 51.4,8.7 R30.1@51.575,8.875 ; U6.7@51.472,46.722 U6.7@51.975,46.722 ; R7.1@55.325,39.75 55.325,39.15 C1.1@56.1,38.375 56.1,37.775 v2(56.25,37.625) 56.311,37.564 U2.14@56.311,36.425 ; U2.4@58.111,31.125 59,31.125 59.375,30.75 v2(59.5,30.75) ; R12.1@59.55,20.925 v2(60.25,20.925) R13.1@60.925,20.925 R14.1@62.3,20.925 ; R9.1@60.175,35.7 60.225,35.75 v2(60.875,35.75) ; U3.8@60.3,28.35 60.3,29.95 C7.1@60.475,30.125 60.875,30.125 v2(61.125,30.375) ; v2(61,8.75) 61.325,8.75 R29.1@61.575,9 ; C13.1@41.005,37.08 40.955,37.13 40.999,37.175 C13.1@41.1,37.175 ; C13.1@41.005,37.08 41.14,37.08 v2(41.235,37.175) C13.1@41.1,37.175 ; C13.1@41.005,37.08 C13.1@41.1,37.175
  other v2: 48.75,32.125 13.25,36.25 14,36.25 14.75,36.25 16.15,36.908 29.5,37.125 16.15,37.65 16.15,38.463 13.125,39 13.875,39 14.625,39 15.375,39 50.8,46.325
+5.0VA: C33.1 C40.1 C41.1 C44.1 C45.1 J5.1 U7.21 U7.24 U8.3 | length 14.1
  Component Side w0.25: C44.1@12.125,23.245 12.575,23.695 U7.21@13.998,23.695
  Component Side w0.5: C33.1@8.75,43.875 v2(10.875,43.875) 11.575,43.875 U8.3@12.075,43.375 ; C41.1@9.125,21.28 11.056,21.28 11.481,21.705 12.125,21.705 12.142,21.722 12.386,21.722 12.681,21.426 13.22,21.426 13.515,21.722 13.525,21.722 13.996,22.193 U7.24@13.998,22.193 ; C40.1@9.125,23.17 12.05,23.17 C44.1@12.125,23.245
  other v2: 12.05,22.125 12.2,23.775
+5.0VBUS: FIL1.1 R1.1 U2.3 U2.42 | length 3.6
  Component Side w0.254: U2.42@53.811,28.325 53.811,29.436 v2(53.875,29.5) ; v2(56.875,30.625) U2.3@58.111,30.625 ; v1(57.25,25) R1.1@57.825,25 ; v1(63.75,33.75) FIL1.1@63.75,34.3
AGND: C36.2 C37.2 C38.2 C39.2 C40.2 C41.2 C44.2 C45.2 FIL4.1 FIL5.2 U7.16 U7.20 U7.25 U7.29 U7.33 | length 21.8
  Component Side w0.254: C40.2@9.125,25.97 10.8,25.97 C44.2@12.125,24.645 ; FIL4.1@11.675,26.25 v2(12.25,26.25) ; C38.2@12.123,27.345 C39.2@12.123,28.72 ; v1@12.123,29.498 v1(12.125,29.5) FIL5.2@12.125,30.175 ; U7.20@13.998,24.195 U7.33@16.198,24.195 ; U7.25@14.698,21.495 14.698,22.195 15.251,22.747 15.251,22.76 U7.33@16.442,23.951 ; U7.16@14.698,26.395 14.698,25.695 U7.33@16.198,24.195 ; U7.29@16.698,21.495 16.698,23.695 U7.33@16.442,23.951 ; U7.33@16.198,24.195 U7.33@16.442,23.951
  Component Side w0.3: C41.2@9.125,18.48 v1(9.125,19.325) ; v1@11.5,20.07 v1(11.5,20.2) ; C44.2@12.125,24.645 v1(12.125,25.25) ; U7.29@16.723,21.495 16.723,21.129 16.875,20.978 v2(16.875,20.801) 16.875,20.55 17.2,20.225 C36.2@17.2,20.125
  Component Side w0.5: C37.2@17.2,18.75 v1(17.2,19.438) C36.2@17.2,20.125
  other v1: 1.125,16.125 1.625,17.125 1.125,18.125 1.625,19.125 1.125,20.125 1.625,21.125 1.125,22.125 1.625,23.125 1.125,24.125 1.625,25.125 1.125,26.125 1.625,27.125 12.125,28 1.125,28.125 1.625,29.125 1.125,30.125
  other v2: 9.125,16 17.75,16.125 9.375,30.125 17.75,30.25
  other v4: 15.248,22.745 16.448,22.745 17.648,22.745 15.248,23.945 16.448,23.945 17.648,23.945 15.248,25.145 16.448,25.145 17.648,25.145
ANT_CONN: A1.1 C15.1 L1.2 | length 6
  Component Side w0.225: L1.2@32.375,47.8 L1.2@32.375,48 32.375,51.225 A1.1@32.375,53.775
ANT_FILT: FL1.3 L1.1 | length 2.6
  Component Side w0.225: FL1.3@32.375,44.6 L1.1@32.375,47 L1.1@32.375,47.2
ANT_UC: FL1.1 U5.31 | length 3.2
  Component Side w0.225: U5.31@32.342,40.63 FL1.1@32.342,43.808
CC_INTERNAL_AVDD: C16.1 C17.1 C18.1 C19.1 L2.1 U5.25 U5.36 U5.48 | length 24.4
  Component Side w0.254: C18.1@24.5,41 26.475,41 L2.1@26.5,40.975 ; L2.1@26.5,40.725 26.502,40.723 28.421,40.723 29.644,39.5 C16.1@29.825,39.5 30.048,39.277 30.048,38.82 30.675,38.82 30.916,38.58 U5.36@31.292,38.58 ; C17.1@30.117,32.55 30.147,32.58 v1(30.75,32.58) U5.48@31.292,32.58 ; v1(35.15,41.442) 35.342,41.25 U5.25@35.342,40.63
  Solder Side w0.254: v2(29.325,39.15) 29.655,38.82 31.689,38.82 ; v1(30.75,32.58) 31.689,33.519 31.689,38.82 ; v1(35.15,41.442) 35.15,41.15 34.5,40.5 32.452,40.5 31.689,39.737 31.689,38.82
CC_INTERNAL_DVDD: C21.1 C22.1 C23.1 L4.1 U5.9 U5.56 | length 22.2
  Component Side w0.254: L4.1@25.367,32.2 v1(26.892,32.2) ; U5.56@35.342,32.03 35.342,31.551 35.75,31.142 v1(35.75,31.125) ; U5.9@39.892,36.58 39.914,36.602 40.898,36.602 41.3,36.2 C22.1@41.3,36
  Solder Side w0.254: v1(26.892,32.2) 27.065,32.027 34.848,32.027 v1(35.75,31.125) ; v1@35.75,31.128 v1(35.75,31.125) ; v1(40.93,36.525) 40.853,36.602 40.157,36.602 40.142,36.587 40.092,36.587 39.394,35.889 39.394,35.022 39.004,34.632 38.684,34.632 38.294,34.242 38.294,33.922 37.904,33.532 37.584,33.532 37.194,33.142 37.194,32.569 v1(35.75,31.125)
CC_NRST: C14.1 R6.1 R19.2 U5.32 | length 29.7
  Component Side w0.254: C14.1@26.942,43.98 26.967,43.955 29.326,43.955 30.797,42.484 v1@30.797,42.422 ; R19.2@26.95,42.5 C14.1@26.95,43.875 ; v1(30.75,42.375) 31,42.125 31,41.856 31.842,41.015 U5.32@31.842,40.63 ; v1(41.975,42.125) 47.625,42.125 49.464,40.286 R6.1@51.3,40.286
  Solder Side w0.254: v1(30.75,42.375) 41.975,42.375 v1(41.975,42.125)
CC_PA: C48.1 C49.1 C50.1 U5.33 U5.42 | length 24.1
  Component Side w0.254: C49.1@21.875,33.775 C48.1@21.875,35.6 ; v1(22.775,36.5) C48.1@21.875,35.6 ; C50.1@30.45,41.25 30.45,40.922 v1@30.75,40.621 ; v1(30.75,40.625) v1@30.75,40.621 ; U5.42@31.292,35.58 27.794,35.58 27.362,35.148 22.327,35.148 C48.1@21.875,35.6 ; U5.33@31.292,40.08 v1@30.75,40.621
  Solder Side w0.254: v1(22.775,36.5) 26.775,40.5 30.625,40.5 v1(30.75,40.625)
CC_TCK: R2.1 U5.19 | length 10.5
  Component Side w0.254: U5.19@38.342,40.63 38.342,41.084 38.415,41.157 43.978,41.157 45.899,39.236 R2.1@47.55,39.236
CC_TDI: R3.1 U5.17 | length 11.9
  Component Side w0.254: U5.17@39.342,40.63 43.969,40.63 45.625,38.974 45.625,38.061 47.386,36.3 R3.1@48.925,36.3
CC_TDO: R4.1 U5.16 | length 5.7
  Component Side w0.254: U5.16@39.892,40.08 39.94,40.128 43.314,40.128 R4.1@44.925,38.517
CC_TMS: R5.1 U5.20 | length 15.3
  Component Side w0.254: U5.20@37.842,40.63 37.842,41.12 38.258,41.536 44.214,41.536 45.875,39.875 48.067,39.875 48.938,39.004 50.268,39.004 50.647,38.625 R5.1@51.225,38.625
DISP_D/C\: DS1.4 U5.64 | length 26.7
  Component Side w0.254: v1(39.25,29.875) 39.342,29.967 U5.64@39.342,32.03
  Solder Side w0.254: DS1.4@23.14,12.025 23.14,13.765 v1(39.25,29.875)
DISP_R\S\T\: DS1.16 U5.2 | length 28.4
  Component Side w0.254: U5.2@39.892,33.08 39.965,33.007 40.168,33.007 40.623,32.552 40.623,32.432 40.98,32.075 v1(43.55,32.075)
  Solder Side w0.254: v1(43.55,32.075) 43.55,24.075 53.62,14.005 DS1.16@53.62,12.025
FLASH_CLK: R21.2 U5.11 U6.6 | length 19.9
  Component Side w0.254: U5.11@39.892,37.58 40.58,37.58 40.502,37.658 v1(40.502,37.702) ; U6.6@51.975,45.452 52.673,45.452 v1(53.375,44.75) 54.138,45.513 R21.2@54.138,45.825
  Solder Side w0.254: v1(40.502,37.702) 45.918,37.702 45.995,37.625 53.247,44.878 v1(53.375,44.75)